# Altium PCB 3 Phase ESC.PcbDoc (part 2 of 2)
Units mm, origin at the board's own origin, x right, y up, seen from the top; angles counter-clockwise.
Board outline 102.1 x 51.3 mm, 2 copper layers (Top Layer, Bottom Layer); 75 components, 54 nets, 218 pads, 48 vias.
Unrouted connection lines stored in the file: 133.
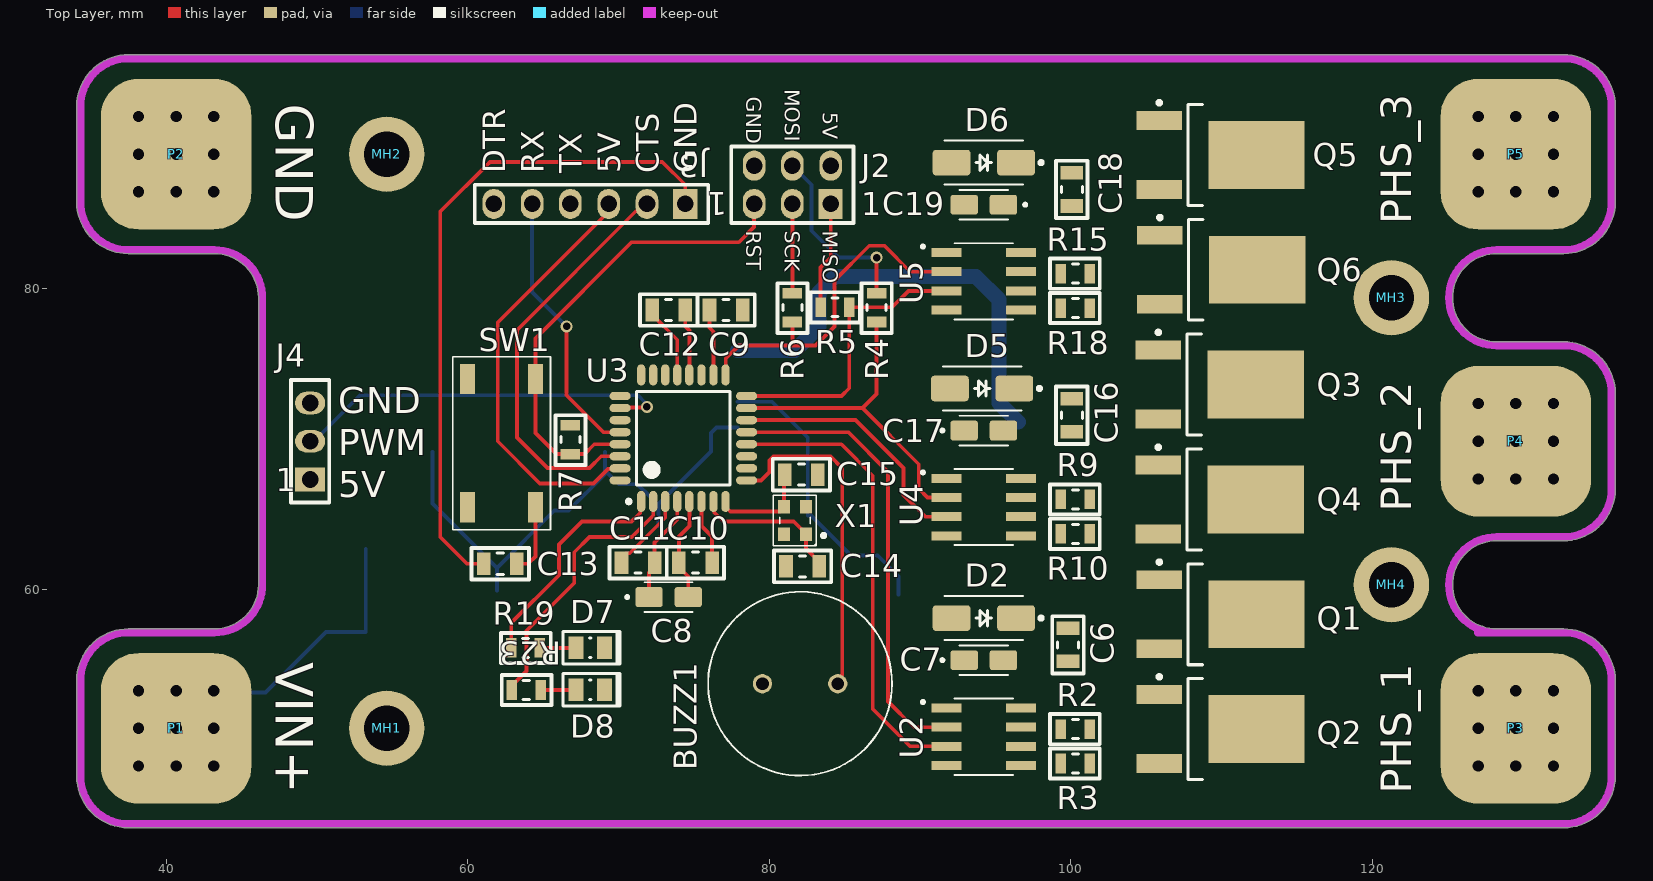
[diagram p0: Top Layer view]

## Via types
v1: diameter 1, hole 0.75, Top Layer to Bottom Layer, 45 vias
v2: diameter 0.8, hole 0.5, Top Layer to Bottom Layer, 3 vias

## Nets (pads, with @x,y where several pads share a name; then routed paths per layer and width w, separated by ;. In a path a pad name is that pad's centre, name@x,y a point inside that pad or via, vN(x,y) a via of type N, cw(c..) or ccw(c..) an arc to the next point about the centre after c; other vN are vias at no path point) (continued)
MCU_BUZZ1: (continued)
  Top Layer w0.254: U3.9 79.444,67.252 80.01,67.818 80.01,68.58 80.264,68.834 84.074,68.834 84.836,68.072 84.836,54.333 84.542,54.039 BUZZ1.1
MCU_LED2: R19.2 U3.1 | length 15.2
  Top Layer w0.254: R19.2 62.87,57.79 66.04,60.96 66.04,62.992 67.564,64.516 70.866,64.516 71.438,65.088 71.438,65.795 U3.1
MCU_LED3: R23.2 U3.2 | length 18
  Top Layer w0.254: R23.2 62.92,53.64 63.881,54.601 63.881,57.277 67.056,60.452 67.056,62.484 68.072,63.5 70.876,63.5 72.295,64.919 U3.2
MCU_MISO: J2.1 R5.2 | length 7.1
  Top Layer w0.254: R5.2 83.403,81.371 84.074,82.042 J2.1
MCU_MOSI: J2.5 R4.2 | length 12.3
  Top Layer w0.254: R4.2 87.122,79.666 v2(87.122,82.042)
  Bottom Layer w0.254: J2.5 82.804,86.868 82.804,83.82 84.582,82.042 v2(87.122,82.042)
MCU_PD2: R11.1 R13.1 R16.1 U3.32
MCU_RST: J2.3 R7.1 SW1.4 U3.29 | length 31.8
  Top Layer w0.254: U3.29 68.382,69.652 67.732,69.002 R7.1 65.872,69.002 64.48,70.394 SW1.4 64.48,76.672 70.866,83.058 77.978,83.058 78.994,84.074 J2.3
MCU_SCK: J2.2 R6.2 | length 5.9
  Top Layer w0.254: R6.2 J2.2
MCU_X1: C14.2 U3.7 X1.1 | length 9.9
  Top Layer w0.254: U3.7 76.352,65.795 76.352,65.126 76.962,64.516 81.627,64.516 82.427,63.716 X1.1 82.427,62.726 83.31,61.843 C14.2
MCU_X2: C15.2 U3.8 X1.3 | length 6.7
  Top Layer w0.254: U3.8 77.095,65.507 77.409,65.193 80.704,65.193 80.977,65.466 X1.3 80.977,67.59 C15.2
NetC13_1: C13.1 SW1.3 | length 4.7
  Top Layer w0.254: C13.1 64.008,61.722 64.48,62.194 SW1.3
NetD4_2: D4.2 R1.1
NetD7_2: D7.2 R19.1 | length 2.4
  Top Layer w0.254: R19.1 67.157,56.134 D7.2
NetD8_2: D8.2 R23.1 | length 2.4
  Top Layer w0.254: R23.1 67.157,53.34 D8.2
PHASE_1: P3.1 Q1.3 Q2.4 R12.2
  other v1: 127.04,48.3 129.54,48.3 132.04,48.3 127.04,50.8 129.54,50.8 132.04,50.8 127.04,53.3 129.54,53.3 132.04,53.3
PHASE_2: P4.1 Q3.3 Q4.4 R14.2
  other v1: 127.04,67.35 129.54,67.35 132.04,67.35 127.04,69.85 129.54,69.85 132.04,69.85 127.04,72.35 129.54,72.35 132.04,72.35
PHASE_3: P5.1 Q5.3 Q6.4 R17.2
  other v1: 127.04,86.4 129.54,86.4 132.04,86.4 127.04,88.9 129.54,88.9 132.04,88.9 127.04,91.4 129.54,91.4 132.04,91.4
PWM_IN: J4.2 U3.26 | length 25.8
  Top Layer w0.254: U3.26 70.137,72.094 71.84,72.094 v2(71.882,72.136)
  Bottom Layer w0.254: J4.2 49.78,69.85 52.828,72.898 71.286,72.898 71.465,72.718 71.465,72.701 71.882,72.284 v2(71.882,72.136)
TTL_CTS: J3.5 U3.28 | length 18.2
  Top Layer w0.254: v2(66.548,77.47) 66.548,72.898 68.994,70.452 U3.28
  Bottom Layer w0.254: J3.5 64.262,79.756 v2(66.548,77.47)
TTL_DTR: C13.2 J3.1 | length 44.7
  Top Layer w0.254: C13.2 59.944,61.722 58.166,63.5 58.166,85.09 61.468,88.392 72.898,88.392 74.422,86.868 J3.1
TTL_RX: J3.2 U3.30 | length 27.2
  Top Layer w0.254: U3.30 68.852,68.852 68.072,68.072 65.278,68.072 63.246,70.104 63.246,77.216 71.14,85.11 71.394,85.11 J3.2
TTL_TX: J3.3 U3.31 | length 28.5
  Top Layer w0.254: J3.3 69.342,85.09 61.976,77.724 61.976,69.85 64.77,67.056 68.326,67.056 69.286,68.016 70.059,68.016 U3.31
VCC: C2.1 C3.1 C4.1 D1.4 Q1.4 Q3.4 Q5.4 U1.1 | length 36.2
  Bottom Layer w0.254: C3.1 57.658,65.71 D1.4@61.924,61.444 ; D1.4 D1.4@61.924,61.444 ; C4.1 C4.1@69.088,67.909 ; C2.1 C2.1@72.644,65.62 ; U1.1 76.496,70.768 76.128,70.4 76.128,69.178 72.644,65.694 C2.1@72.644,65.62 ; D1.4@61.924,61.444 65.727,65.247 66.679,65.247 69.088,67.656 C4.1@69.088,67.909 ; C4.1@69.088,67.909 70.006,66.992 71.227,66.992 71.681,66.538 71.726,66.538 C2.1@72.644,65.62
VIN: D1.1 D1.3 P1.1 | length 20.7
  Bottom Layer w0.254: v1(40.64,50.8) 43.013,53.173 46.569,53.173 50.59,57.194 D1.1 D1.3
  other v1: 38.14,48.3 40.64,48.3 43.14,48.3 38.14,50.8 43.14,50.8 38.14,53.3 40.64,53.3 43.14,53.3
VOUT: D3.1 L1.1 U1.2 | length 19.7
  Bottom Layer w0.254: U1.2 80.186,72.468 82.55,70.104 D3.1 82.775,64.914 85.426,62.263 87.199,62.263 88.572,60.89 L1.1
pads on no net: MH1.1 MH2.1 MH3.1 MH4.1 SW1.2 U1.5 U3.10 U3.11 U3.19 U3.22 U3.27

## Polygon pours and split planes (outlines as drawn)
GND on Bottom Layer "GND_L02_P004" (solid, pour order 4): 75.946,73.406 75.692,73.66 75.692,74.676 75.946,74.93 82.55,74.93 84.328,76.708 84.328,79.248 85.09,80.01 92.71,80.01 93.472,79.248 93.472,69.088 92.71,68.326 85.09,68.326 84.328,69.088 84.328,71.628 82.55,73.406
VCC on Bottom Layer "VCC_L02_P001" (solid, pour order 1): 55.88,65.532 55.88,71.12 57.15,72.39 69.85,72.39 70.866,71.374 79.756,71.374 80.01,71.12 80.01,63.246 77.724,60.96 68.58,60.96 67.31,59.69 67.31,54.61 66.04,53.34 58.928,53.34 57.658,54.61 57.658,63.754
5V on Bottom Layer "5V_L02_P003" (solid, pour order 3): 95.25,57.15 96.52,55.88 100.33,55.88 101.6,57.15 101.6,71.12 100.33,72.39 96.52,72.39 95.25,71.12
VOUT on Bottom Layer "VOUT_L02_P002" (solid, pour order 2): 75.692,72.898 75.946,73.152 81.788,73.152 83.566,71.374 83.566,68.834 84.836,67.564 92.964,67.564 93.98,66.548 93.98,57.15 92.71,55.88 87.63,55.88 86.36,57.15 86.36,58.42 85.09,59.69 82.042,59.69 80.772,60.96 80.772,71.12 80.01,71.882 75.946,71.882 75.692,72.136
VIN on Bottom Layer "VIN_L02_P000" (solid, pour order 0): 35.56,53.34 38.1,55.88 45.72,55.88 48.26,58.42 48.26,63.5 49.53,64.77 55.372,64.77 56.896,63.246 56.896,55.88 55.626,54.61 53.34,54.61 50.8,52.07 50.8,48.26 48.26,45.72 38.1,45.72 35.56,48.26

## Keep-outs
Keep-Out Layer:
  lines w0.5: 127,57.15 132.715,57.15 cw(c132.715,53.975) 135.89,53.975 135.89,47.625 cw(c132.715,47.625) 132.715,44.45 37.465,44.45 cw(c37.465,47.625) 34.29,47.625 34.29,53.975 cw(c37.465,53.975) 37.465,57.15 43.18,57.15 ccw(c43.18,60.325) 46.355,60.325 46.355,79.375 ccw(c43.18,79.375) 43.18,82.55 37.465,82.55 cw(c37.465,85.725) 34.29,85.725 34.29,92.075 cw(c37.465,92.075) 37.465,95.25 132.715,95.25 cw(c132.715,92.075) 135.89,92.075 135.89,91.44 135.89,85.725 cw(c132.715,85.725) 132.715,82.55 128.27,82.55 ccw(c128.27,79.375) 125.095,79.375 ccw(c128.27,79.375) 128.27,76.2 132.715,76.2 cw(c132.715,73.025) 135.89,73.025 135.89,66.675 cw(c132.715,66.675) 132.715,63.5 128.27,63.5 ccw(c128.27,60.325) 125.095,60.325 ccw(c128.27,60.325) 128.27,57.15

## Silkscreen, mask and mechanical layers (free items; w line width, h text height)
Top Overlay:
  text "MOSI" at 81.022,93.222 h1 r270
  text "GND" at 78.482,92.714 h1 r270
  text "GND" at 47.236,92.232 h2.5 r270
  text "5V" at 83.562,91.698 h1 r270
  text "DTR" at 62.488,87.626 h1.5 r90
  text "RX" at 65.028,87.626 h1.5 r90
  text "TX" at 67.568,87.626 h1.5 r90
  text "5V" at 70.108,87.626 h1.5 r90
  text "CTS" at 72.648,87.626 h1.5 r90
  text "GND" at 75.188,87.626 h1.5 r90
  text "PHS_3" at 122.611,84.235 h2 r90
  text "RST" at 78.482,83.824 h1 r270
  text "SCK" at 81.022,83.824 h1 r270
  text "MISO" at 83.562,83.824 h1 r270
  text "GND" at 51.404,71.724 h1.75
  text "PWM" at 51.404,68.93 h1.75
  text "5V" at 51.404,66.136 h1.75
  text "PHS_2" at 122.611,65.185 h2 r90
  text "VIN+" at 47.236,55.174 h2.5 r270
  text "PHS_1" at 122.611,46.468 h2 r90

## Text inside footprints (layer, text, board x,y; h text height)
J2: Top Overlay "1" at 86.106,84.836 h1.52
J3: Top Overlay "1" at 77.216,86.36 h1.52 r180
J4: Top Overlay "1" at 47.244,66.548 h1.52